# Altium PCB Eln1Project.PcbDoc
Units mm, origin at the board's own origin, x right, y up, seen from the top; angles counter-clockwise.
Board outline 32.84 x 32.84 mm, 4 copper layers (Top Layer, Internal Plane 1, Internal Plane 2, Bottom Layer), stack 1.57 mm thick; 31 components, 25 nets, 130 pads, 78 vias.
Unrouted connection lines stored in the file: 1.
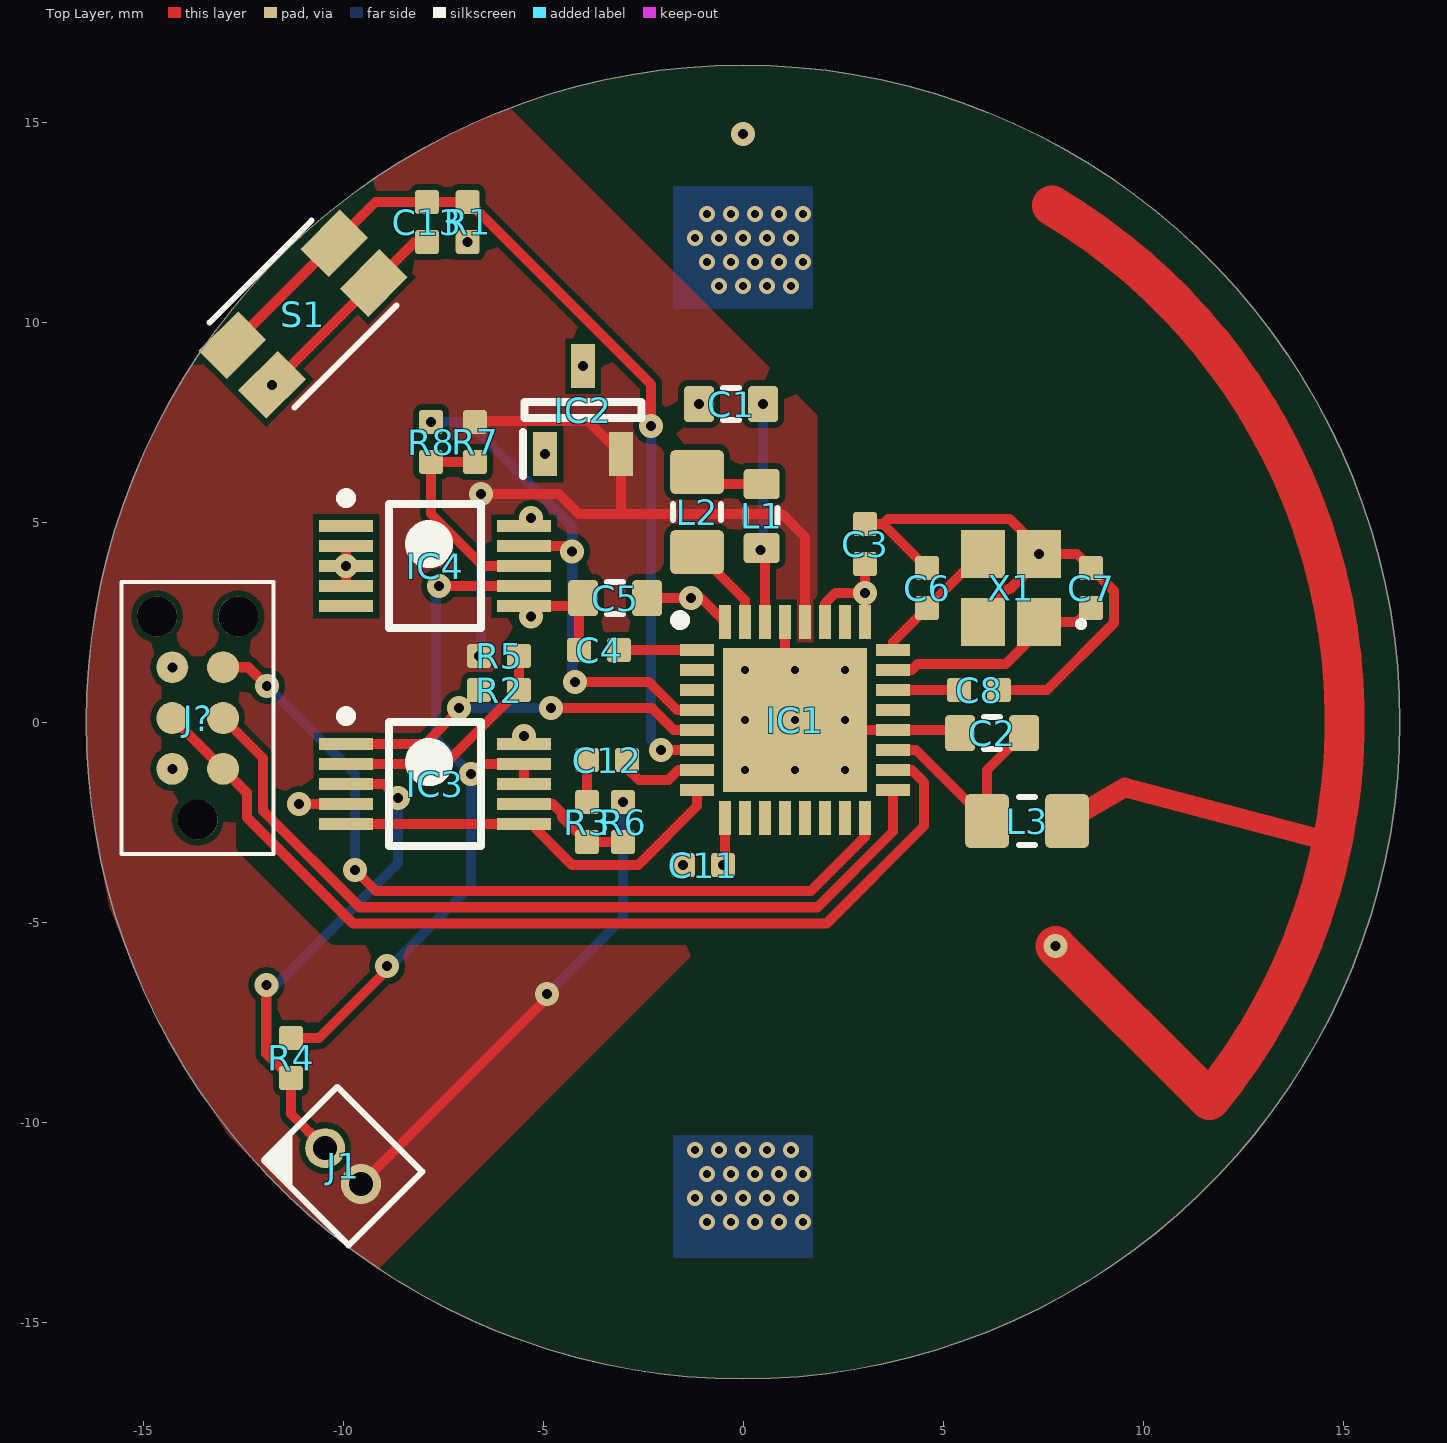
[diagram p0: Top Layer view]
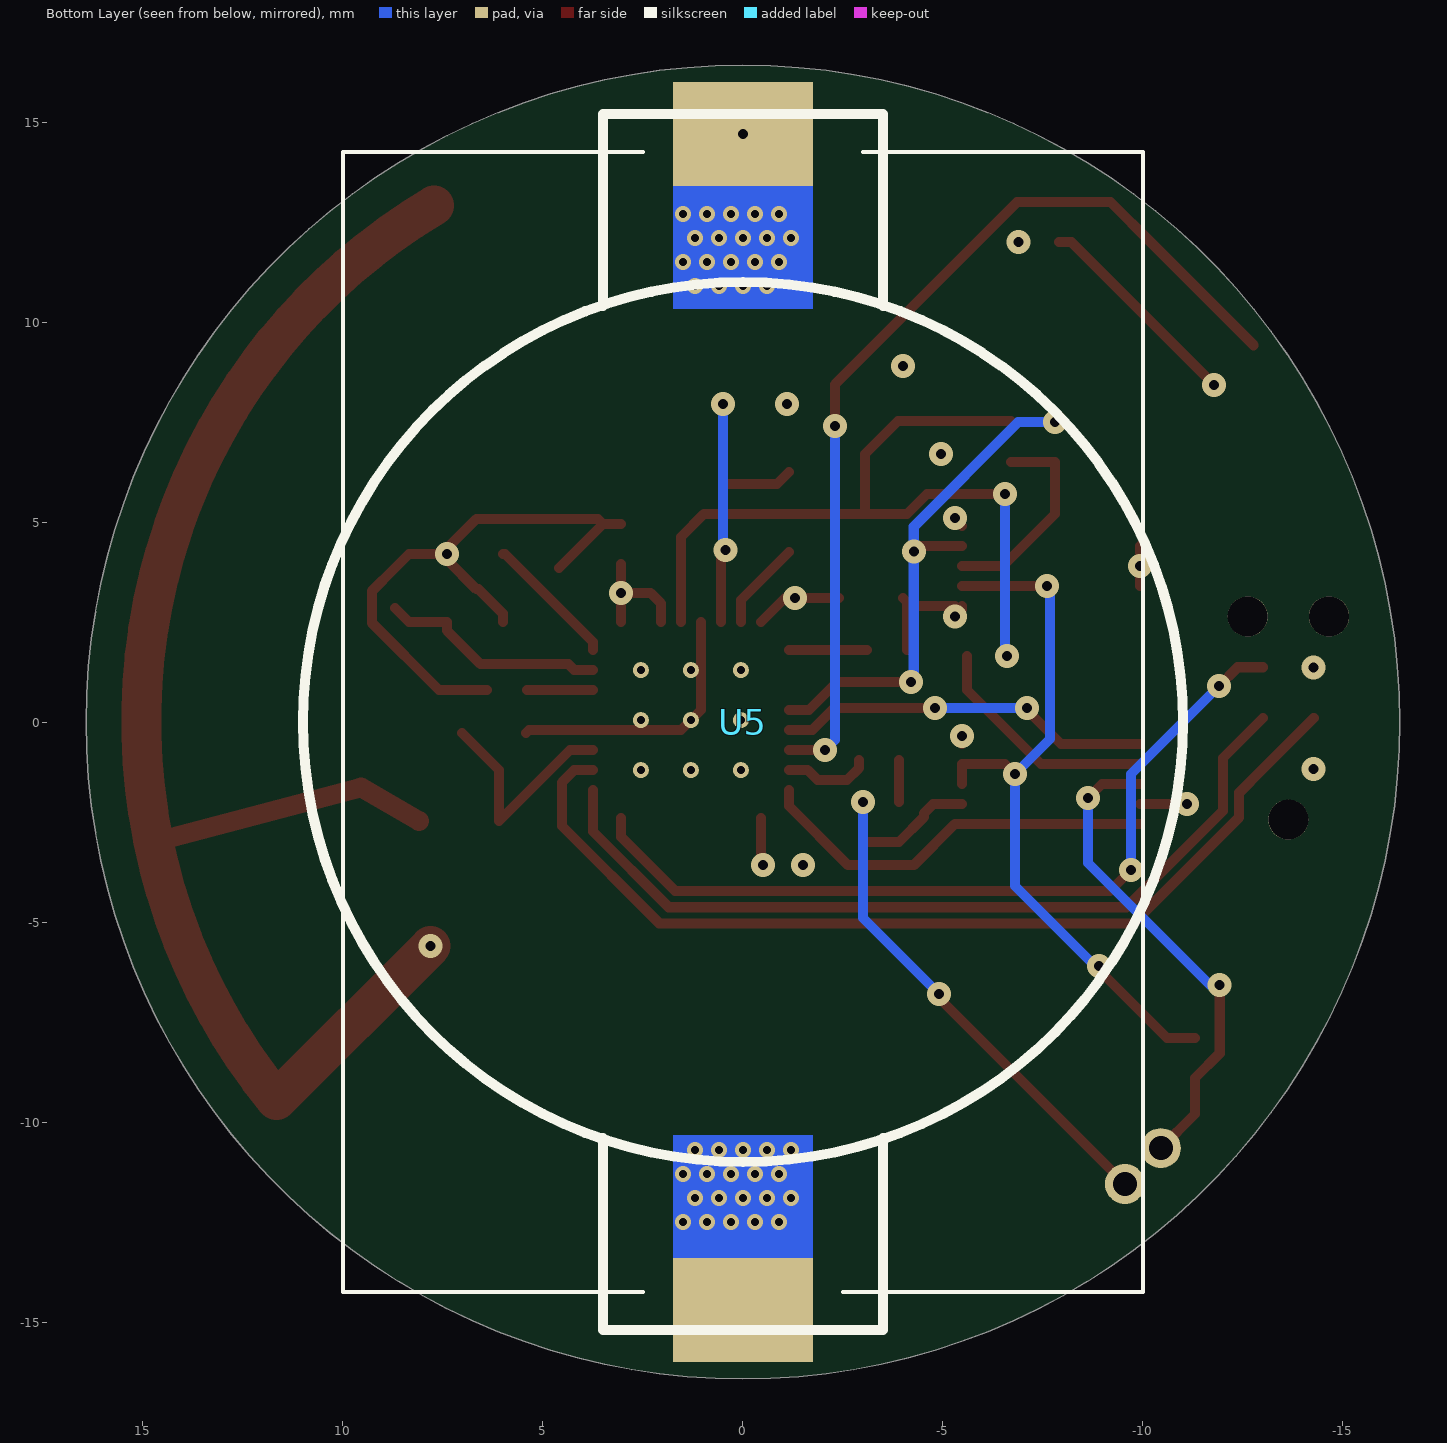
[diagram p1: Bottom Layer view, seen from below]
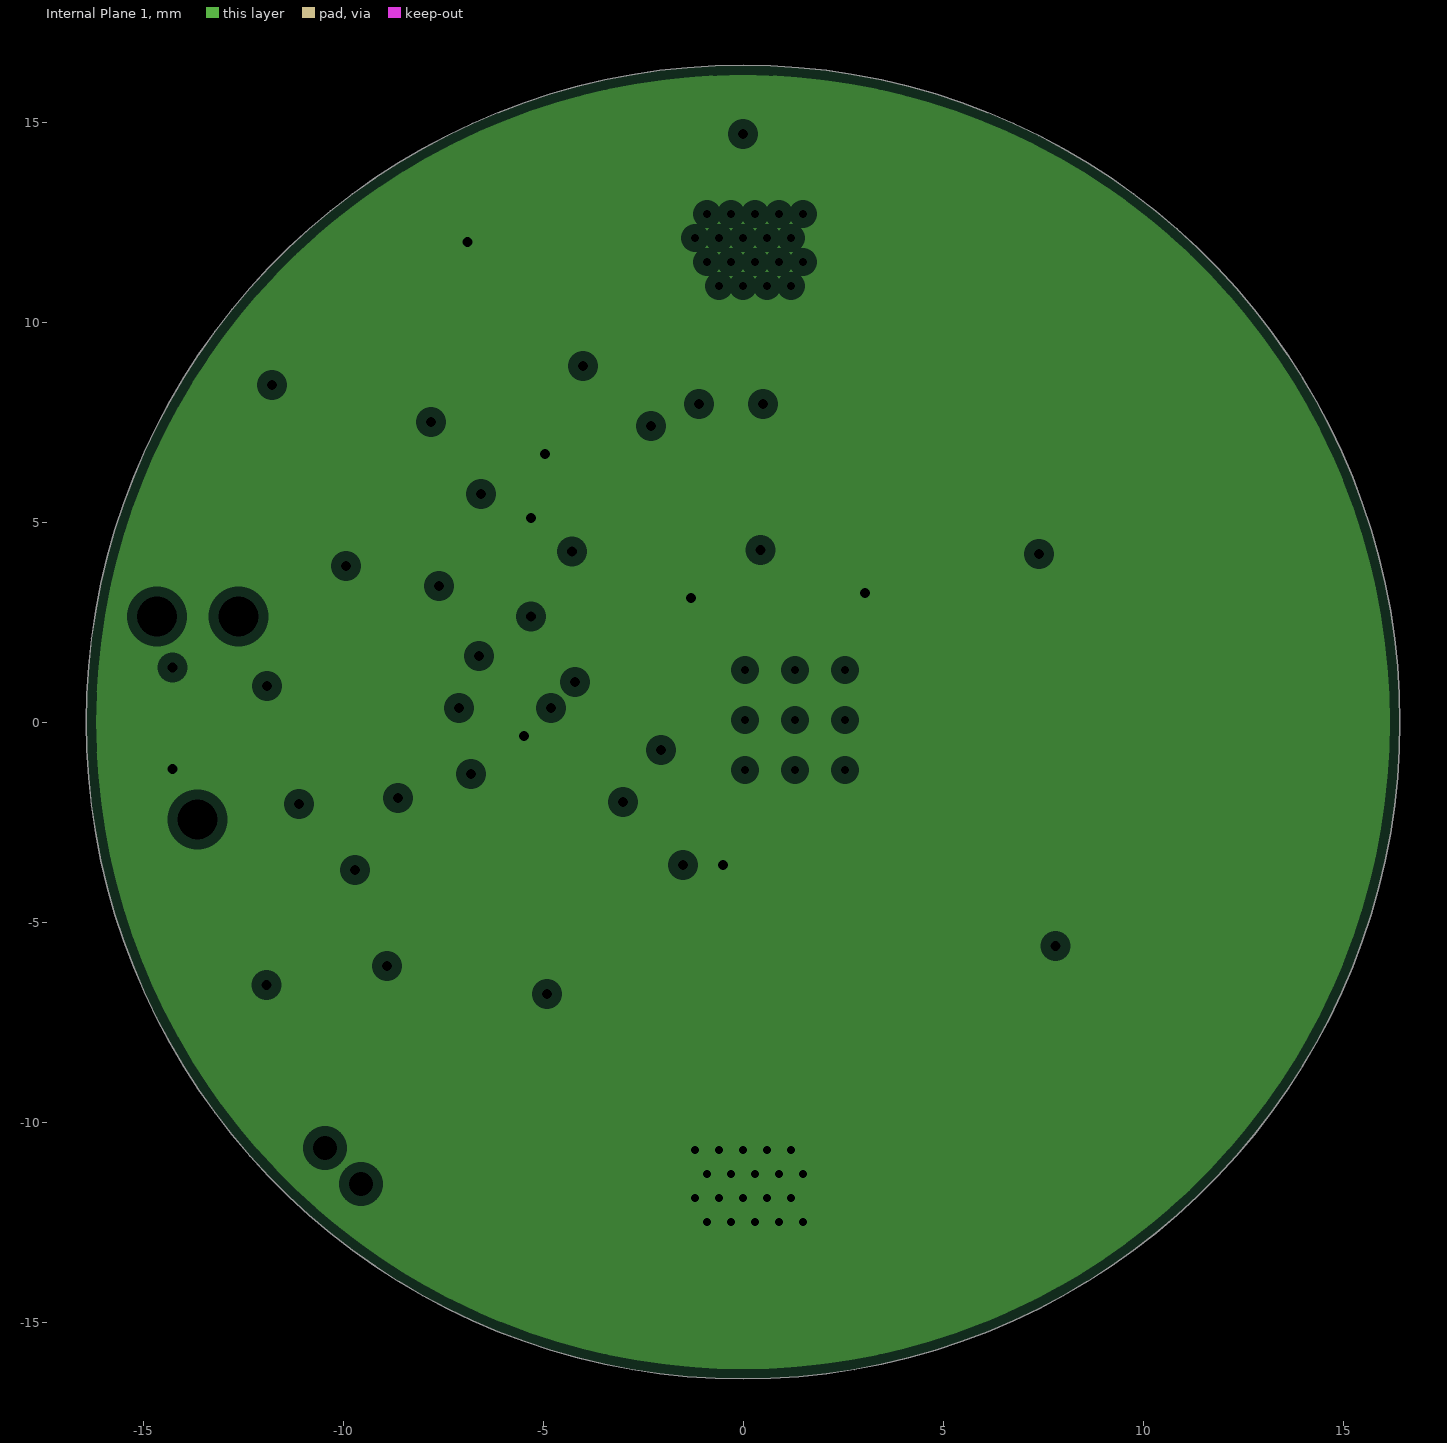
[diagram p2: Internal Plane 1, clearances drawn from the general rule]
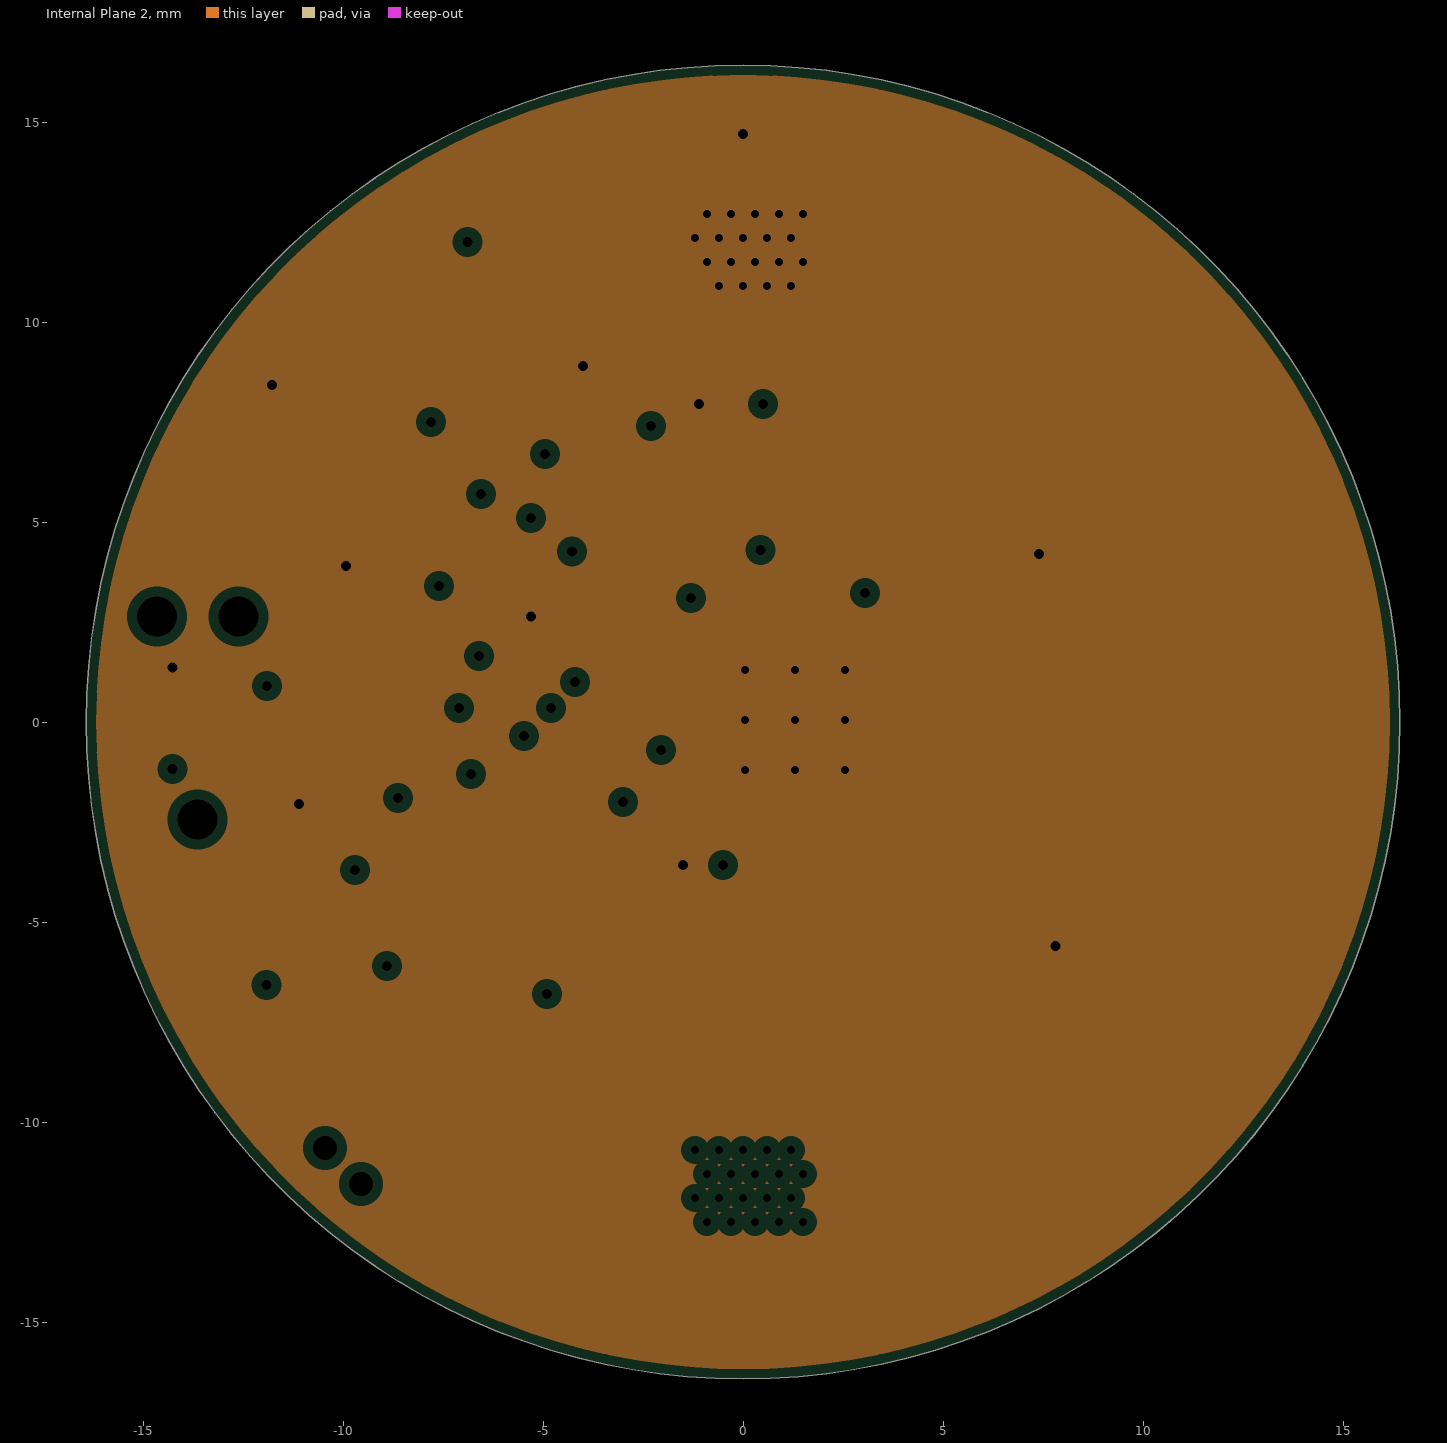
[diagram p3: Internal Plane 2, clearances drawn from the general rule]

## Layer stack, top to bottom
Top Solder: solder mask 0.1, Solder Resist, Dk 3.5
Top Layer: signal copper 0.035
Dielectric 1: core 0.36, FR-4, Dk 4.2
Internal Plane 1: plane copper 0.035, net +3V
Dielectric 3: prepreg 0.71, Dk 4.2
Internal Plane 2: plane copper 0.035, net GND
Dielectric 2: core 0.36, Dk 4.2
Bottom Layer: signal copper 0.035
Bottom Solder: solder mask 0.1, Solder Resist, Dk 3.5

## Board outline
-16.422,0 ccw(c0,0) 0,-16.422 ccw(c0,0) 16.422,0 ccw(c0,0) 0,16.422 ccw(c0,0)

## Design rules (kind name [scope] priority, off if disabled: settings)
AcuteAngle [All] p1 off: minimum=9.00000000000000E+0001 checktracksonly=TRUE
AssemblyTestPointUsage [All] p1 off:
AssemblyTestpoint [All] p1 off: testpointundercomponent=TRUE minsize=1.016 maxsize=2.54 preferedsize=1.524 minholesize=0 maxholesize=1.016 preferedholesize=0.813 testpointgrid=0.025 usegrid=TRUE gridtolerance=0 allowsidetop=TRUE allowsidebottom=TRUE
BoardOutlineClearance [All] p1 off: gap=0.25 ignorepadtopadclearanceinfootprint=FALSE
Clearance [All] p1: gap=0.15 ignorepadtopadclearanceinfootprint=FALSE except(0: Arc-Hole Track-Hole SMDPad-Hole THPad-Hole Via-Hole Fill-Hole Poly-Hole Region-Hole Text-Hole)
ComponentClearance [All] p1 off: gap=0.25 collisioncheckmode=3 verticalgap=0.25 showdistances=FALSE
DiffPairsRouting [All] p1 off: maxlimit=0.254 minlimit=0.254 mostfreqgap=0.254 toplayer_minwidth=0.381 toplayer_maxwidth=0.381 toplayer_prefwidth=0.381 bottomlayer_minwidth=0.381 bottomlayer_maxwidth=0.381 bottomlayer_prefwidth=0.381 maxuncoupledlength=12.7
FabricationTestPointUsage [All] p1 off: valid=0 allowmultiple=FALSE
FabricationTestpoint [All] p1 off: side=3 testpointundercomponent=TRUE minsize=1.016 maxsize=2.54 preferedsize=1.524 minholesize=0 maxholesize=1.016 preferedholesize=0.813 testpointgrid=0.025 allowsidetop=TRUE allowsidebottom=TRUE usegrid=TRUE gridtolerance=0
FanoutControl Fanout_BGA [IsBGA] p1 off: bgadir=Out bgaviamode=Centered fanoutstyle=Auto fanoutdirection=Alternating viagrid=0.025 // Fanout_BGA (Default Rule)
FanoutControl Fanout_LCC [IsLCC] p2 off: bgadir=Out bgaviamode=Centered fanoutstyle=Auto fanoutdirection=Alternating viagrid=0.025 // Fanout_LCC (Default Rule)
FanoutControl Fanout_SOIC [IsSOIC] p3 off: bgadir=Out bgaviamode=Centered fanoutstyle=Auto fanoutdirection=Alternating viagrid=0.025 // Fanout_SOIC (Default Rule)
FanoutControl Fanout_Small [(CompPinCount < 5)] p4 off: bgadir=Out bgaviamode=Centered fanoutstyle=Auto fanoutdirection=OutThenIn viagrid=0.025 // Fanout_Small (Default Rule)
FanoutControl Fanout_Default [All] p5 off: bgadir=Out bgaviamode=Centered fanoutstyle=Auto fanoutdirection=Alternating viagrid=0.025 // Fanout_Default (Default Rule)
Height [All] p1 off: minheight=0 maxheight=25.4 prefheight=12.7
HoleSize [All] p1: absolutevalues=TRUE maxlimit=3 minlimit=0.25 maxpercent=80.000 minpercent=20.000
HoleToHoleClearance [All] p1 off: gap=0.25 allowstackedmicrovias=TRUE
LayerPairs [All] p1 off: enforce=TRUE
MinimumAnnularRing [All] p1 off: minimumring=0.175
MinimumSolderMaskSliver [All] p1 off: minsoldermaskwidth=0
NetAntennae [All] p1 off: netantennaetolerance=0
PasteMaskExpansion [All] p1 off: expansion=0
PlaneClearance [All] p1: clearance=0.25
PlaneConnect [All] p1: planeconnectstyle=Direct reliefexpansion=0.5 reliefentries=4 reliefconductorwidth=0.25 reliefairgap=0.25
PolygonConnect [All] p1: connectstyle=Direct reliefconductorwidth=0.25 reliefentries=4 polygonreliefangle="90 Angle" airgapwidth=0.25
RoutingCorners [All] p1 off: cornerstyle=45-Degree minsetback=2.5 maxsetback=2.5
RoutingLayers [All] p1 off: top layer_v5=TRUE bottom layer_v5=TRUE
RoutingPriority [All] p1 off: routingpriority=0
RoutingTopology [All] p1 off: topology=Shortest
RoutingVias [All] p1: holewidth=0.25 width=0.6 viastyle="Through Hole" minholewidth=0.15 minwidth=0.5 maxholewidth=0.9 maxwidth=1.5 viatemplateguid#1={857F750E-5D3C-416E-893E-D7E0D3E4223C} viatemplatename#1=v60h25m0mx0
SilkToBoardRegionClearance [All] p1 off:
SilkToSilkClearance [All] p1 off: silktosilkclearance=0
SilkToSolderMaskClearance [IsPad] p1 off: minsilkscreentomaskgap=0 clearancetoexposedcopper=TRUE
SolderMaskExpansion [All] p1: expansion=0
Width [All] p1: maxlimit=4 minlimit=0.15 preferedwidth=0.25
3 further rules are at their usual default settings.

## Classes and differential pairs
differential pair MES: +MES_P -MES_N

## Components (designator, comment, footprint, x,y, rotation, side; value= is the part's Value field where it differs from the comment)
C1 "1uF" "CAPACITOR 1608 REFLOW" -0.3,7.95 r0 top
C2 "0.8pF" "CAPACITOR 1608 REFLOW" 6.225,-0.275 r0 top
C3 "100nF" "CAPACITOR 1005 REFLOW" 3.05,4.45 r270 top
C4 "100nF" "CAPACITOR 1005 REFLOW" -3.6,1.8 r0 top
C5 "4.7uF" "CAPACITOR 1608 REFLOW" -3.2,3.1 r0 top
C6 "12pF" "CAPACITOR 1005 REFLOW" 4.6,3.35 r90 top
C7 "12pF" "CAPACITOR 1005 REFLOW" 8.7,3.35 r90 top
C8 "100nF" "CAPACITOR 1005 REFLOW" 5.9,0.8 r0 top
C11 "100nF" "CAPACITOR 1005 REFLOW" -1,-3.577 r0 top
C12 "10nF" "CAPACITOR 1005 REFLOW" -3.4,-0.95 r0 top
C13 "680nF" "CAPACITOR 1005 REFLOW" -7.9,12.5 r90 top
IC1 "NRF52810-QCAA-T" QFN50P500X500X80-33N 1.3,0.05 r0 top
IC2 "ISL21080CIH315Z-TK" SOT95P237X112-3N -4,7.8 r90 top
IC3 "OPA2316 - VSSOP" "OPA2316 - VSSOP" -7.7,-1.55 r0 top
IC4 "OPA2316 - VSSOP" "OPA2316 - VSSOP" -7.7,3.9 r0 top
J1 "*" "PinHeader1x2 P1.27" -10,-11.1 r315 top
J? "TAG CONNECT TC2030-MCP-NL" "TAG CONNECT TC2030-MCP-NL" -13.635,0.1 r90 top
L1 "15nH" "INDUCTOR 1608 REFLOW" 0.465,5.15 r90 top
L2 "10uH" "INDUCTOR 2012 REFLOW" -1.15,5.25 r270 top
L3 "3.9nH" "INDUCTOR 2012 REFLOW" 7.1,-2.475 r0 top
R1 "220K" "RESISTOR 1005 REFLOW" -6.884,12.5 r270 top
R2 "22k" "RESISTOR 1005 REFLOW" -6.1,0.8 r0 top
R3 "100k" "RESISTOR 1005 REFLOW" -3.9,-2.5 r90 top
R4 "10k" "RESISTOR 1005 REFLOW" -11.3,-8.4 r90 top
R5 "10k" "RESISTOR 1005 REFLOW" -6.1,1.65 r0 top
R6 "50k" "RESISTOR 1005 REFLOW" -3,-2.5 r270 top
R7 "10k" "RESISTOR 1005 REFLOW" -6.7,7 r270 top
R8 "22k" "RESISTOR 1005 REFLOW" -7.8,7 r270 top
S1 "*" "Push Switch Panasonic EVQ-P7J01P" -11,10.2 r225 top
U5 "SMTU2032-C.TR" SMTU2032CTR 0,0 r90 bottom locked
X1 "32MHz" FA20H160000MF12ZAC3 6.7,3.35 r90 top

## Footprints (in the part's own frame and the unit in brackets; to place one, negate y for a bottom-side part, rotate by r counter-clockwise, add the part's x,y. Pads: shape width x height; smd on the part's side, far side on the other; paste and mask are expansions set on the pad)
"CAPACITOR 1005 REFLOW" [mm] "Capacitor SMD 1.0x0.5mm (0402-imperial)"
  rrect25% 0.6x0.6 smd: 1(-0.5,0) 2(0.5,0)
  body extent -0.5,-0.25 0.5,0.25, height 0.5
"CAPACITOR 1608 REFLOW" [mm] "Capacitor SMD 1.6x0.8mm (0603-imperial)"
  rrect25% 0.75x0.9 smd: 1(-0.8,0) 2(0.8,0)
  silkscreen extent -0.2,-0.4 0.2,0.4, body extent -0.8,-0.4 0.8,0.4, height 0.8
FA20H160000MF12ZAC3 [mm]
  rect 1.2x1.1 smd: 1(-0.85,-0.7) 2(0.85,-0.7) 3(0.85,0.7) 4(-0.85,0.7)
  silkscreen extent -0.95,-1.8 -0.85,-1.7, body extent -1.34,-1.14 1.34,1.14, height 0.65
"INDUCTOR 1608 REFLOW" [mm] "Inductor SMD 1.6x0.8mm (0603-imperial)"
  rrect25% 0.75x0.9 smd: 1(-0.8,0) 2(0.8,0)
  silkscreen extent -0.2,-0.4 0.2,0.4, body extent -0.8,-0.4 0.8,0.4, height 0.45
"INDUCTOR 2012 REFLOW" [mm] "Inductor SMD 2.0x1.2mm (0805-imperial)"
  rrect25% 1.1x1.35 smd: 1(-1,0) 2(1,0)
  silkscreen extent -0.2,-0.6 0.2,0.6, body extent -1,-0.6 1,0.6, height 0.6
"OPA2316 - VSSOP" [mm] "SSOP, 10-Leads, Body 3,00x3,00mm, Pitch 0,50mm, IPC Medium Density"
  rect 1.35x0.3 smd: 1(-2.225,1) 2(-2.225,0.5) 3(-2.225,0) 4(-2.225,-0.5) 5(-2.225,-1) 6(2.225,-1) 7(2.225,-0.5) 8(2.225,0) 9(2.225,0.5) 10(2.225,1)
  silkscreen extent -2.35,-1.55 1.15,1.82, body extent -1.55,-1.55 1.55,1.55, height 1.75
"PinHeader1x2 P1.27" [mm] "Plug connector"
  round 1 hole 0.6: 1(-0.635,0) 2(0.635,0)
  silkscreen extent -1.51,-1.3 1.5,1.3, body extent -1.27,-1.1 1.27,1.1, height 4
"Push Switch Panasonic EVQ-P7J01P" [mm] "Push Switch Panasonic EVQ-P7J01P"
  rect 1.4x1 smd: 1(-1.8,0.7) 1(1.8,0.7) 2(-1.8,-0.7) 2(1.8,-0.7)
  silkscreen extent -1.8,-1.5 1.8,1.5, body extent -1.8,-2 1.8,1.5, height 1.35
QFN50P500X500X80-33N [mm]
  rect 0.85x0.3 smd: 1(-2.45,1.75) 2(-2.45,1.25) 3(-2.45,0.75) 4(-2.45,0.25) 5(-2.45,-0.25) 6(-2.45,-0.75) 7(-2.45,-1.25) 8(-2.45,-1.75) 17(2.45,-1.75) 18(2.45,-1.25) 19(2.45,-0.75) 20(2.45,-0.25) 21(2.45,0.25) 22(2.45,0.75) 23(2.45,1.25) 24(2.45,1.75)
  rect 0.3x0.85 smd: 9(-1.75,-2.45) 10(-1.25,-2.45) 11(-0.75,-2.45) 12(-0.25,-2.45) 13(0.25,-2.45) 14(0.75,-2.45) 15(1.25,-2.45) 16(1.75,-2.45) 25(1.75,2.45) 26(1.25,2.45) 27(0.75,2.45) 28(0.25,2.45) 29(-0.25,2.45) 30(-0.75,2.45) 31(-1.25,2.45) 32(-1.75,2.45)
  round 0.4 hole 0.2: 33(-1.25,-1.25) 33(-1.25,0) 33(-1.25,1.25) 33(0,-1.25) 33(0,0) 33(0,1.25) 33(1.25,-1.25) 33(1.25,0) 33(1.25,1.25)
  rect 3.6x3.6 smd: 33(0,0)
  silkscreen extent -3,2.38 -2.75,2.62, body extent -2.55,-2.55 2.55,2.55, height 0.8
"RESISTOR 1005 REFLOW" [mm] "Resistor SMD 1.0x0.5mm (0402-imperial)"
  rrect25% 0.6x0.6 smd: 1(-0.5,0) 2(0.5,0)
  body extent -0.5,-0.25 0.5,0.5, height 25
SMTU2032CTR [mm]
  rect 2.6x3.5 smd: 1(-14.7,0) 2(14.7,0)
  silkscreen extent -15.2,-11 15.2,11, body extent 0,0 0,0
SOT95P237X112-3N [mm]
  rect 1.1x0.6 smd: 1(-1.1,0.95) 2(-1.1,-0.95) 3(1.1,0)
  silkscreen extent -1.65,-1.46 0.2,1.5, body extent -1.18,-1.46 1.18,1.46, height 1.12
"TAG CONNECT TC2030-MCP-NL" [mm] "TAG CONNECT TC2030-MCP-NL"
  round 1 hole 1 unplated: 0(-2.54,0) 0(2.54,-1.016) 0(2.54,1.016)
  round 0.8 smd: 1(-1.27,-0.635) 2(-1.27,0.635) 3(0,-0.635) 4(0,0.635) 5(1.27,-0.635) 6(1.27,0.635)
  silkscreen extent -3.4,-1.9 3.4,1.9

## Part data
C1 C2 C3 C4 C5 C6 C7 C8 C11 C12 C13: library part Capacitor, "Capacitor"
IC1: "Integrated Circuit", Manufacturer_Name="Nordic Semiconductor", Mouser Part Number=949-NRF52810-QCAA-T, RS Part Number=1697120P, Datasheet Link=https://componentsearchengine.com/Datasheets/1/nRF52810-QCAA-T.pdf, Height=0.8mm, Manufacturer_Part_Number=NRF52810-QCAA-T, Mouser Price/Stock=https://www.mouser.co.uk/ProductDetail/Nordic-Semiconductor/nRF52810-QCAA-T?qs=5aG0NVq1C4ykfpvypn%2FnAA%3D%3D, RS Price/Stock=http://uk.rs-online.com/web/p/products/1697120P
IC2: "Integrated Circuit", Manufacturer_Name="Renesas Electronics", Mouser Part Number=968-ISL21080CIH315ZT, Datasheet Link=https://www.renesas.com/en-us/www/doc/datasheet/isl21080.pdf, Height=1.12mm, Manufacturer_Part_Number=ISL21080CIH315Z-TK, Mouser Price/Stock=http://www.mouser.com/Search/ProductDetail.aspx?qs=9fLuogzTs8LxZWNzls3EKw%3d%3d
J1: library part PinHeader1x2, "Plug connector"
L1 L2 L3: library part Inductor, "Inductor"
R1 R2 R3 R4 R5 R6 R7 R8: library part Resistor, "Resistor"
S1: library part "Push Switch, 4 pins, SPST-NO", "Push Switch, 4 pins"
U5: "Undefined or Miscellaneous", Manufacturer_Name=RENATA, Mouser Part Number=614-SMTU2032-C.TR, Datasheet Link=https://componentsearchengine.com/Datasheets/1/SMTU2032-C.TR.pdf, Height=5.6mm, Manufacturer_Part_Number=SMTU2032-C.TR, Mouser Price/Stock=https://www.mouser.co.uk/ProductDetail/Renata/SMTU2032-CTR?qs=UxeAxwACbqlbJ4Hul%252BCKVg%3D%3D
X1: library part FA-20H_32.0000MF20X-K5, "Crystal or Oscillator", Manufacturer_Name="Epson Timing", Manufacturer_Part_Number="FA-20H 32.0000MF20X-K5", Mouser Part Number=732-FA-20H32MF20X-K5, Datasheet Link=https://support.epson.biz/td/api/doc_check.php?dl=brief_FA-20H&lang=en, Height=0.55mm, Mouser Price/Stock=https://www.mouser.co.uk/ProductDetail/Epson-Timing/FA-20H-320000MF20X-K5?qs=f9yNj16SXrLwvA3JhG%252BQFg%3D%3D

## Via types
v1: diameter 0.6, hole 0.25, Top Layer to Bottom Layer, 39 vias
v2: diameter 0.4, hole 0.2, Top Layer to Bottom Layer, tented both sides, 39 vias

## Nets (pads, with @x,y where several pads share a name; then routed paths per layer and width w, separated by ;. In a path a pad name is that pad's centre, name@x,y a point inside that pad or via, vN(x,y) a via of type N, cw(c..) or ccw(c..) an arc to the next point about the centre after c; other vN are vias at no path point)
+1.5V: IC1.28 IC2.2 J1.2 R5.1 R6.1 R7.1 | length 32.7
  Top Layer w0.254: J1.2 -4.802,-6.8 v1(-4.9,-6.8) ; R7.1 -6.7,7.527 -3.877,7.527 IC2.2 -3.05,5.25 -3.1,5.2 ; v1(-6.55,5.7) -4.6,5.7 -4.1,5.2 -3.1,5.2 ; IC1.28 1.55,4.627 0.977,5.2 -3.1,5.2
  Bottom Layer w0.254: v1(-6.6,1.65) -6.55,1.7 v1(-6.55,5.7) ; v1(-4.9,-6.8) -3,-4.9 v1(-3,-2)
+3V: C3.2 C5.2 C11.2 IC1.9 IC1.25 IC1.27 IC1.32 IC2.1 IC3.10 IC4.10 J?.2 R1.2 U5.1 | length 6.8
  Top Layer w0.254: IC4.10 -5.3,5.075 v1(-5.3,5.1) ; IC3.10 v1(-5.475,-0.35) ; C5.2 v1(-1.3,3.1) -1.05,3.1 IC1.32 ; C11.2@-0.45,-3.527 IC1.9 ; IC1.27 2.05,2.967 2.308,3.225 v1(3.05,3.225) ; IC1.25 v1(3.05,3.225) ; C3.2 v1(3.05,3.225)
  other v1: -0.5,-3.577 -14.27,-1.17 -4.95,6.7 -6.884,12
  other v2: -0.9,-12.5 -0.3,-12.5 0.3,-12.5 0.9,-12.5 1.5,-12.5 -1.2,-11.9 -0.6,-11.9 0,-11.9 0.6,-11.9 1.2,-11.9 -0.9,-11.3 -0.3,-11.3 0.3,-11.3 0.9,-11.3 1.5,-11.3 -1.2,-10.7 -0.6,-10.7 0,-10.7 0.6,-10.7 1.2,-10.7
GND: C1.1 C2.1 C3.1 C4.1 C5.1 C6.2 C7.2 C8.2 C11.1 C13.1 IC1.20 IC1.29 IC1.33 IC2.3 IC3.4 IC4.2 IC4.3 IC4.4 IC4.6 J?.6 L3.2 S1.1 U5.2 X1.2 X1.4 | length 70.7
  Top Layer w0.254: v1(-11.778,8.432) -9.232,10.978 -8.21,12 C13.1 ; v1(-11.1,-2.05) IC3.4 ; IC4.4 v1(-9.925,3.9) IC4.2 ; IC4.6 -5.475,2.815 v1(-5.3,2.64) ; IC4.6@-5.3,2.9 -4.2,2.9 C5.1@-4.1,3 ; C4.1 C5.1@-4.1,3 ; C5.1 C5.1@-4.1,3 ; IC1.29 1.05,0.3 1.55,-0.2 IC1.20 5.35,-0.2 C2.1 ; C3.1 3.5,4.95 ; C6.2 3.5,4.95 ; X1.4 6,2.71 6.613,3.323 6.665,3.323 X1.2@7.4,4.058 ; C8.2 7.598,0.8 9.277,2.479 9.277,3.273 C7.2 8.35,4.2 v1(7.4,4.2) 7.4,4.342 6.665,5.077 3.627,5.077 3.5,4.95
  Top Layer w0.5: L3.2 9.544,-1.635 14.7,-3
  Top Layer w1: 7.719,12.915 cw(c0.047,0.03) 11.663,-9.454 v1(7.809,-5.6)
  other v1: -1.5,-3.577 -14.27,1.37 -1.1,7.95 -4,8.9 0,14.7
  other v2: -0.6,10.9 0,10.9 0.6,10.9 1.2,10.9 -0.9,11.5 -0.3,11.5 0.3,11.5 0.9,11.5 1.5,11.5 -1.2,12.1 -0.6,12.1 0,12.1 0.6,12.1 1.2,12.1 -0.9,12.7 -0.3,12.7 0.3,12.7 0.9,12.7 1.5,12.7
MES_N: IC1.4 IC4.9 R8.1 | length 13.1
  Top Layer w0.254: IC4.9 -4.406,4.4 v1(-4.271,4.265) ; v1(-4.2,1) -2.35,1 -1.65,0.3 IC1.4
  Bottom Layer w0.254: v1(-7.8,7.5) -6.884,7.5 -4.271,4.887 v1(-4.271,4.265) -4.271,1.071 v1(-4.2,1)
MES_P: IC1.5 IC3.1 R2.1 | length 9.4
  Top Layer w0.254: IC3.1 -7.95,-0.55 v1@-7.075,0.325 ; v1(-4.8,0.35) -2.284,0.35 -1.734,-0.2 IC1.5
  Bottom Layer w0.254: v1(-7.1,0.35) v1(-4.8,0.35)
NetC1_2: C1.2 IC1.30 L1.1 | length 5.4
  Top Layer w0.254: IC1.30 L1.1@0.55,4.265
  Bottom Layer w0.254: v1(0.435,4.3) 0.5,4.365 v1(0.5,7.95)
NetC2_2: C2.2 IC1.19 L3.1 | length 5.7
  Top Layer w0.254: IC1.19 4.325,-0.7 L3.1 6.1,-1.2 C2.2
NetC4_2: C4.2 IC1.1 | length 1.9
  Top Layer w0.254: C4.2 IC1.1@-1.15,1.8
NetC6_1: C6.1 IC1.24 X1.3 | length 3.4
  Top Layer w0.254: IC1.24 3.75,2 C6.1 5.95,4.2 X1.3
NetC7_1: C7.1 IC1.23 X1.1 | length 5.7
  Top Layer w0.254: IC1.23 4.217,1.3 4.367,1.45 6.565,1.45 7.4,2.285 X1.1 8.35,2.5 C7.1
NetC8_1: C8.1 IC1.22 | length 1.7
  Top Layer w0.254: IC1.22 C8.1
NetC12_1: C12.1 R3.2 | length 1.1
  Top Layer w0.254: R3.2 C12.1
NetIC1_16: IC1.16 J?.5 | length 20.8
  Top Layer w0.254: J?.5 -12.37,1.37 v1(-11.9,0.9) ; v1(-9.7,-3.7) -9.175,-4.225 1.692,-4.225 3.05,-2.867 IC1.16
  Bottom Layer w0.254: v1(-11.9,0.9) -9.7,-1.3 v1(-9.7,-3.7)
NetIC1_17: IC1.17 J?.3 | length 21.3
  Top Layer w0.254: J?.3 -12,-0.9 -12,-2.216 -9.587,-4.629 1.859,-4.629 3.75,-2.738 IC1.17
NetIC1_18: IC1.18 J?.1 J?.4 | length 24.3
  Top Layer w0.254: J?.4 J?.1 -12.404,-1.766 -12.404,-2.383 -9.754,-5.033 2.092,-5.033 4.525,-2.6 4.525,-1.508 4.217,-1.2 IC1.18
NetIC1_31: IC1.31 L2.2 | length 2.2
  Top Layer w0.254: L2.2 0.05,3.05 IC1.31
NetIC3_2: IC3.2 R2.2 R5.2 | length 5.9
  Top Layer w0.254: IC3.2 -7.45,-1.05 R2.2 R5.2
NetIC3_7: IC3.7 R3.1 R6.2 | length 2.9
  Top Layer w0.254: IC3.7 -4.758,-2.05 -4.523,-2.285 -4.523,-2.377 R3.1 ; R3.1 R6.2
NetIC3_8: IC3.8 IC3.9 IC4.7 R4.2 | length 18.1
  Top Layer w0.254: R4.2 -10.6,-7.9 -8.9,-6.2 v1(-8.9,-6.1) ; v1(-7.6,3.4) IC4.7 ; v1(-6.8,-1.3) -6.55,-1.05 IC3.9 IC3.8
  Bottom Layer w0.254: v1(-8.9,-6.1) -8.8,-6.1 -6.8,-4.1 v1(-6.8,-1.3) -7.677,-0.423 -7.677,3.323 v1(-7.6,3.4)
NetIC4_8: IC4.8 R7.2 R8.2 | length 5.3
  Top Layer w0.254: R7.2 R8.2 -7.8,5.2 -6.5,3.9 IC4.8
NetL1_2: L1.2 L2.1 | length 1.7
  Top Layer w0.254: L2.1 -0.85,5.95 L1.2
PROBE: IC3.3 J1.1 R4.1 | length 12.3
  Top Layer w0.254: v1(-11.919,-6.575) -11.919,-8.281 R4.1 -11.3,-9.8 J1.1 ; IC3.3 -8.975,-1.55 v1(-8.625,-1.9)
  Bottom Layer w0.254: v1(-11.919,-6.575) -11.675,-6.575 -8.625,-3.525 v1(-8.625,-1.9)
SHDWN: IC1.8 IC3.5 IC3.6 IC4.5 | length 10.2
  Top Layer w0.254: IC3.5 IC3.6 -5.298,-2.55 -4.271,-3.577 -3.529,-3.577 -2.627,-3.577 -1.15,-2.1 IC1.8
SIGPROBE: C12.2 IC1.7 | length 2.2
  Top Layer w0.254: C12.2 -2.9,-1.152 -2.602,-1.45 -1.867,-1.45 -1.617,-1.2 IC1.7
SW: C13.2 IC1.6 R1.1 S1.2 | length 24
  Top Layer w0.254: S1.2@-12.768,9.422 -10.222,11.968 -9.19,13 C13.2 R1.1 -6.858,13 -2.3,8.442 v1(-2.3,7.4) ; v1(-2.05,-0.7) IC1.6
  Bottom Layer w0.254: v1(-2.3,7.4) -2.3,-0.45 v1(-2.05,-0.7)
pads on no net: IC1.2 IC1.3 IC1.10 IC1.11 IC1.12 IC1.13 IC1.14 IC1.15 IC1.21 IC1.26 IC4.1 J?.0

## Polygon pours and split planes (outlines as drawn)
+1.5V on Top Layer "+1.5V_L01_P002" (solid, pour order 2): -16.392,-1.037 cw(c0,0) -5.83,15.355 1.85,7.675 1.85,-2.7 -9.125,-13.675 -10.409,-12.706 -11.448,-11.756 -12.858,-10.346 -13.376,-9.533 -14.298,-8.085 -15.08,-6.509 -15.85,-4.6 -16.206,-2.672
+3V on Internal Plane 1 (split plane): 193 vertices, not listed, extent -16.172,-16.172 16.172,16.172
GND on Internal Plane 2 (split plane): 193 vertices, not listed, extent -16.172,-16.172 16.172,16.172

## Other copper
Bottom Layer:
  rectangle net +3V: -1.75,-13.4 1.75,-10.325
  rectangle net GND: -1.75,10.325 1.75,13.4

## Silkscreen, mask and mechanical layers (free items; w line width, h text height)
Mechanical 1:
  circle w0.254: c0,0 r11.507
  circle w0.254: c0,0 r16.422
Mechanical 15:
  region: 3.979,15.921 3.979,12.796 5.475,12.25 8.1,10.725 10.575,8.225 11.825,6.325 12.625,4.45 13.15,2.65 13.4,0.775 13.4,-0.625 13.25,-2.175 12.95,-3.625 12.375,-5.125 11.6,-6.725 10.85,-7.85 9.425,-9.525 9.425,-13.475 11.475,-11.75 13.075,-9.9 14.675,-7.425 15.675,-4.95 16.225,-2.55 16.425,-0.7 16.375,1.425 15.95,3.9 15.075,6.625 13.6,9.25 11.6,11.65 9.625,13.325 7.45,14.65 5.5,15.475
  lines w0.254: 3.979,15.921 3.979,12.796 cw(c0,0) 9.425,-9.525 9.425,-13.475